# Altium PCB STC12C5A_LQFP44_Mini.PcbDoc
Units mil, origin at the board's own origin, x right, y up, seen from the top; angles counter-clockwise.
Board outline 1305 x 2350 mil, 2 copper layers (Top Layer, Bottom Layer); 39 components, 53 nets, 230 pads, 18 vias.
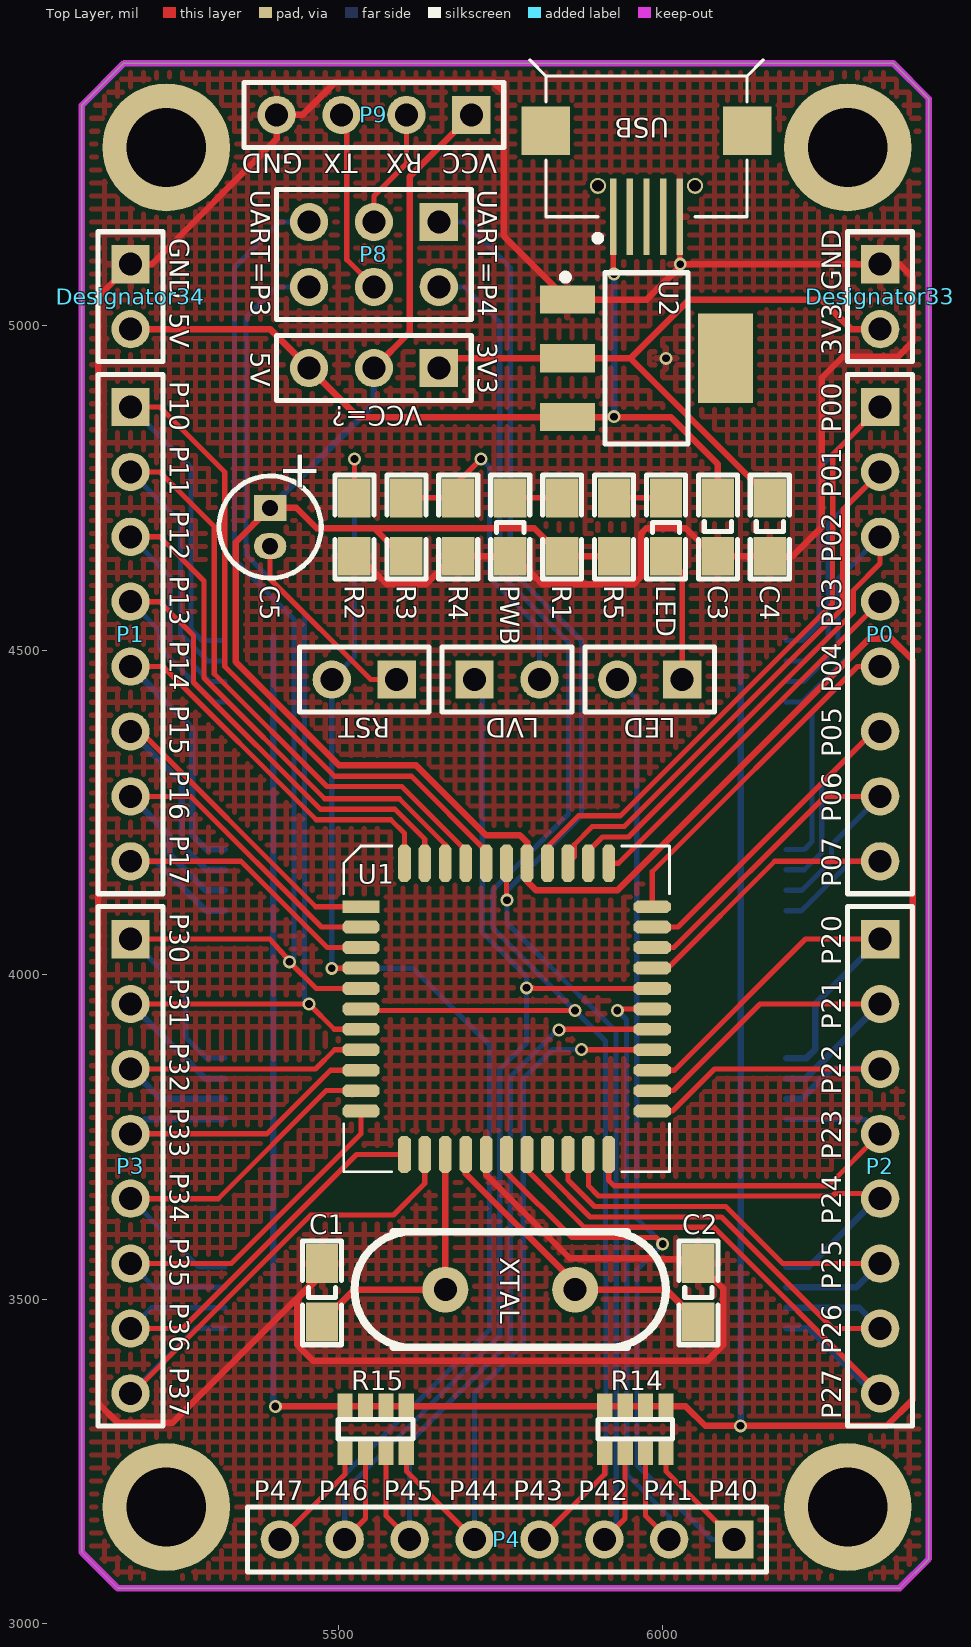
[diagram p0: Top Layer view]
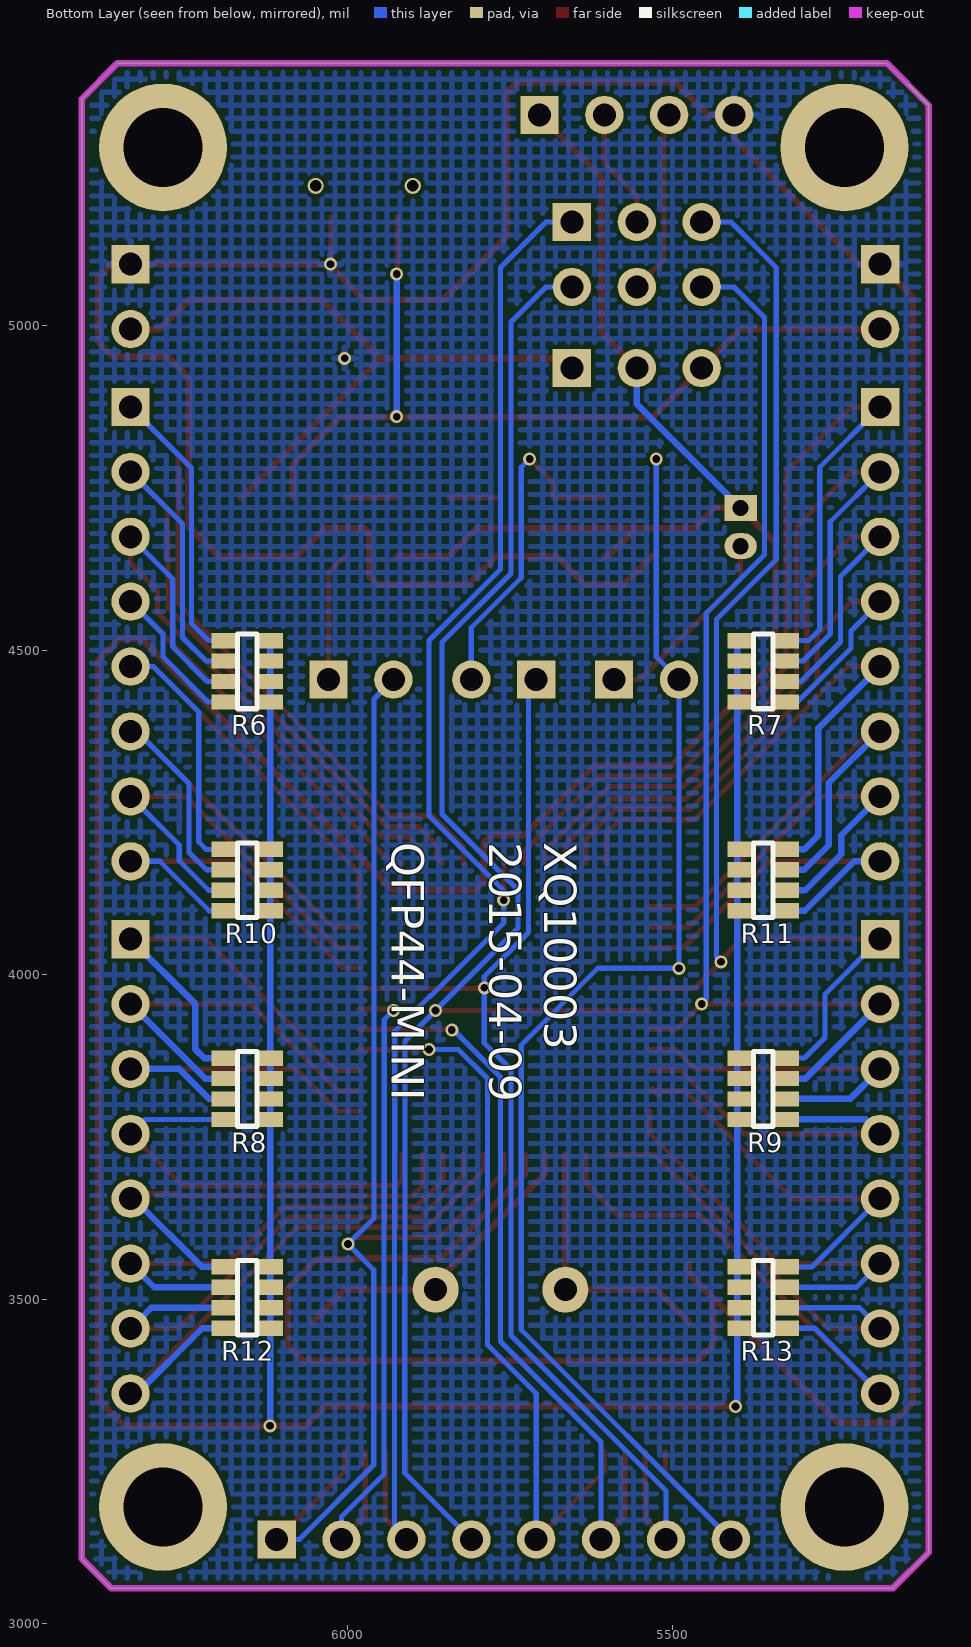
[diagram p1: Bottom Layer view, seen from below]

## Layer stack, top to bottom
Top Layer: signal copper 1.4
Dielectric: dielectric 12.6, FR-4, Dk 4.8
Bottom Layer: signal copper 1.4

## Board outline
5105,3110 5160,3055 6365,3055 6410,3100 6410,5350 6355,5405 5170,5405 5105,5340

## Design rules (kind name [scope] priority, off if disabled: settings)
Clearance [All] p1: gap=6
FabricationTestPointUsage TestPointUsage [All] p1: valid=0 allowmultiple=FALSE
FabricationTestpoint Testpoint [All] p1: side=3 testpointundercomponent=TRUE minsize=40 maxsize=100 preferedsize=60 minholesize=0 maxholesize=40 preferedholesize=32 testpointgrid=1 allowsidetop=TRUE allowsidebottom=TRUE usegrid=TRUE gridtolerance=0.01
HoleSize [All] p1: absolutevalues=TRUE maxlimit=200 minlimit=1 maxpercent=80.000 minpercent=20.000
MinimumSolderMaskSliver [All] p1: minsoldermaskwidth=6
NetAntennae [All] p1: netantennaetolerance=6
PolygonConnect [All] p1: connectstyle=Relief reliefconductorwidth=10 reliefentries=4 polygonreliefangle="90 Angle"
RoutingVias [All] p1: holewidth=12 width=20 viastyle="Through Hole" minholewidth=12 minwidth=20 maxholewidth=28 maxwidth=60
SMDNeckDown [All] p1: percent=100.000
SilkToSilkClearance [All] p1: silktosilkclearance=6
SilkscreenOverComponentPads [All] p1: minsilkscreentomaskgap=0
SolderMaskExpansion [All] p1: expansion=4
Width [All] p1: maxlimit=100 minlimit=6 preferedwidth=8
21 further rules are at their usual default settings.

## Classes and differential pairs
component class STC12C5A_LQFP44_Mini: C1 C2 C3 C4 C5 J1 LED LVD P0 P1 P2 P3 P4 P8 P9 PWB R1 R2 R3 R4 R5 R6 R7 R8 R9 R10 R11 R12 R13 R14 R15 RST U1 U2 VCC=5V Y1

## Components (designator, comment, footprint, x,y, rotation, side; value= is the part's Value field where it differs from the comment)
5V "Header 3" HDR1X3 5655,4935 r180 top (schematic designator P10)
C1 "Cap" C0805 5475,3465 r90 top
C2 "Cap" C0805 6055,3465 r90 top
C3 "Cap" C0805 6085,4645 r90 top
C4 "Cap" C0805 6165,4645 r90 top
C5 "Cap2" CAP-4.2 5395,4690 r270 top
Designator33 "Comment" HDR1X2 6335,5095 r270 top
Designator34 "Comment" HDR1X2 5180,5095 r270 top
LED "Header 2" HDR1X2 6030,4455 r180 top (schematic designator P7)
LED "LED" C0805 6005,4735 r270 top (schematic designator D2)
LVD "Header 2" HDR1X2 5710,4455 r0 top (schematic designator P6)
P0 "Header 8" HDR1X8 6335,4875 r270 top
P1 "Header 8" HDR1X8 5180,4875 r270 top
P2 "Header 8" HDR1X8 6335,4055 r270 top
P3 "Header 8" HDR1X8 5180,4055 r270 top
P4 "Header 8" HDR1X8 6110,3130 r180 top
P8 "Header 3X2A" HDR2X3_CEN 5655,5160 r180 top
P9 "Header 4" HDR1X4 5705,5325 r180 top
PWB "PWB" C0805 5765,4735 r270 top (schematic designator D1)
R1 "Res" 0805 5845,4735 r270 top
R2 "Res" 0805 5525,4645 r90 top
R3 "Res" 0805 5605,4735 r270 top
R4 "Res" 0805 5685,4645 r90 top
R5 "Res" 0805 5925,4735 r270 top
R6 "RES_8P" RES_8P_0603#1 6120,4515 r0 bottom
R7 "RES_8P" RES_8P_0603#2 5395,4515 r180 bottom
R8 "RES_8P" RES_8P_0603#1 6120,3871.67 r0 bottom
R9 "RES_8P" RES_8P_0603#2 5395,3871.67 r180 bottom
R10 "RES_8P" RES_8P_0603#1 6120,4193.33 r0 bottom
R11 "RES_8P" RES_8P_0603#2 5395,4193.33 r180 bottom
R12 "RES_8P" RES_8P_0603#1 6120,3550 r0 bottom
R13 "RES_8P" RES_8P_0603#2 5395,3550 r180 bottom
R14 "RES_8P" RES_8P_0603#2 6005,3335 r270 top
R15 "RES_8P" RES_8P_0603#2 5605,3335 r270 top
RST "Header 2" HDR1X2 5590,4455 r180 top (schematic designator P5)
U1 "STC12C5A60S2_LQFP44" LQFP44 5535,4105 r0 top
U2 "AMS1117" SOT-223 5975,4950 r270 top
USB "USB-MINI" USB-MINI-A-SM 5975,5385 r90 top (schematic designator J1)
XTAL "XTAL" XTAL1 5665,3515 r0 top (schematic designator Y1)

## Footprints (in the part's own frame and the unit in brackets; to place one, negate y for a bottom-side part, rotate by r counter-clockwise, add the part's x,y. Pads: shape width x height; smd on the part's side, far side on the other; paste and mask are expansions set on the pad)
0805 [mil]
  rect 60x50 smd: 1(0,0) 2(90,0)
  silkscreen extent -35,-30 125,30
C0805 [mil]
  rect 60x50 smd: 1(0,0) 2(90,0)
  silkscreen extent -35,-30 125,30
CAP-4.2 [mil] "Capacitor, Electrolytic, Radial; Body 4 x 5 mm (Dia.xH typ); Pin Spacing 1.5 mm (typ)"
  rect 40x50 hole 25: 1(-29.53,0)
  oval 40x50 hole 25: 2(29.53,0)
  silkscreen extent -79,-79 79,79
HDR1X2 [mm] "Connector; Header; 2 Position"
  rect 1.5x1.5 hole 0.9: 1(0,0)
  round 1.5 hole 0.9: 2(2.54,0)
  silkscreen extent -1.27,-1.27 3.81,1.27
HDR1X3 [mm] "Connector; Header; 3 Position"
  rect 1.5x1.5 hole 0.9: 1(0,0)
  round 1.5 hole 0.9: 2(2.54,0) 3(5.08,0)
  silkscreen extent -1.27,-1.27 6.35,1.27
HDR1X4 [mm] "Connector; Header; 4 Position"
  rect 1.5x1.5 hole 0.9: 1(0,0)
  round 1.5 hole 0.9: 2(2.54,0) 3(5.08,0) 4(7.62,0)
  silkscreen extent -1.27,-1.27 8.89,1.27
HDR1X8 [mm] "Connector; Header; 8 Position"
  rect 1.5x1.5 hole 0.9: 1(0,0)
  round 1.5 hole 0.9: 2(2.54,0) 3(5.08,0) 4(7.62,0) 5(10.16,0) 6(12.7,0) 7(15.24,0) 8(17.78,0)
  silkscreen extent -1.27,-1.27 19.05,1.27
HDR2X3_CEN [mm] "Connector; Header; 3x2 Position"
  rect 1.5x1.5 hole 0.9: 1(0,0)
  round 1.5 hole 0.9: 2(2.54,0) 3(5.08,0) 4(0,2.54) 5(2.54,2.54) 6(5.08,2.54)
  silkscreen extent -1.27,-1.27 6.35,3.81
LQFP44 [mm]
  rect 1.45x0.5 smd: 1(0,0)
  oct 1.45x0.5 smd: 2(0,-0.8) 3(0,-1.6) 4(0,-2.4) 5(0,-3.2) 6(0,-4) 7(0,-4.8) 8(0,-5.6) 9(0,-6.4) 10(0,-7.2) 11(0,-8) 23(11.4,-8) 24(11.4,-7.2) 25(11.4,-6.4) 26(11.4,-5.6) 27(11.4,-4.8) 28(11.4,-4) 29(11.4,-3.2) 30(11.4,-2.4) 31(11.4,-1.6) 32(11.4,-0.8) 33(11.4,0)
  oct 0.5x1.45 smd: 12(1.7,-9.7) 13(2.5,-9.7) 14(3.3,-9.7) 15(4.1,-9.7) 16(4.9,-9.7) 17(5.7,-9.7) 18(6.5,-9.7) 19(7.3,-9.7) 20(8.1,-9.7) 21(8.9,-9.7) 22(9.7,-9.7) 34(9.7,1.7) 35(8.9,1.7) 36(8.1,1.7) 37(7.3,1.7) 38(6.5,1.7) 39(5.7,1.7) 40(4.9,1.7) 41(4.1,1.7) 42(3.3,1.7) 43(2.5,1.7) 44(1.7,1.7)
  silkscreen extent -0.67,-10.38 12.08,2.37
RES_8P_0603#1 [mm]
  rect 1.016x0.6 smd: 1(0,0) 2(1.778,0) 3(0,0.8) 4(1.778,0.8) 5(0,1.6) 6(1.778,1.6) 7(0,2.4) 8(1.778,2.4)
  silkscreen extent 0.51,-0.25 1.27,2.67
RES_8P_0603#2 [mm]
  rect 1.016x0.6 smd: 1(0,0) 2(1.778,0) 3(0,-0.8) 4(1.778,-0.8) 5(0,-1.6) 6(1.778,-1.6) 7(0,-2.4) 8(1.778,-2.4)
  silkscreen extent 0.51,-2.67 1.27,0.25
SOT-223 [mm] "SO"
  rect 1.1x2.15 smd: 1(-2.3,-3.1) 2(0,-3.1) 3(2.3,-3.1)
  rect 3.5x2.15 smd: 4(0,3.1)
  silkscreen extent -3.35,-3.3 3.35,1.63
USB-MINI-A-SM [mm]
  rect 3x0.25 smd: 1(-5.508,1.3) 2(-5.508,0.65) 3(-5.508,0) 4(-5.508,-0.65)
  rect 3x0.254 smd: 5(-5.508,-1.3)
  round 0.635 hole 0.457 unplated: MH1(-4.3,1.9) MH2(-4.3,-1.9)
  rect 1.9x1.9 smd: ""(-2.15,3.95) ""(-2.15,-3.95)
  silkscreen extent -6.47,-4.57 0.63,4.57
XTAL1 [mm]
  round 1.8 hole 0.9: 1(0,0) 2(5.08,0)
  silkscreen extent -3.56,-2.26 8.64,2.26

## Part data
5V: "Header, 3-Pin"
C1 C2 C3 C4 C5: "Capacitor"
LED LVD RST: "Header, 2-Pin"
LED PWB: library part LED-2P, "发?"
P0 P1 P2 P3 P4: "Header, 8-Pin"
P8: "Header, 3-Pin, Dual row"
P9: "Header, 4-Pin"
R1 R2 R3 R4 R5: "Resistor"
R6 R7 R8 R9 R10 R11 R12 R13 R14 R15: "贴?"
U1: "增?"
U2: "低压稳压器-1A"
XTAL: "Crystal Oscillator"

## Free pads (board coordinates)
  round 196.85 hole 122.05: 0(5235,3180) 1(6285,3180) 2(6285,5275) 3(5235,5275)

## Via types
v1: diameter 20, hole 12, Top Layer to Bottom Layer, 18 vias

## Nets (pads, with @x,y where several pads share a name; then routed paths per layer and width w, separated by ;. In a path a pad name is that pad's centre, name@x,y a point inside that pad or via, vN(x,y) a via of type N, cw(c..) or ccw(c..) an arc to the next point about the centre after c; other vN are vias at no path point)
3V3: 5V.1 C4.2 Designator33.2 U2.2 | length 1042.1
  Top Layer w10: 5V.1 5670,4950 U2.2 5950,4950 C4.2 ; 5952.91,4952.91 6040,5040 6245,5040 6290,4995 Designator33.2
5V: 5V.3 C3.2 Designator34.2 U2.3 USB.1 | length 1351.6
  Top Layer w8: v1@5923.82,5081.18 USB.1
  Top Layer w10: Designator34.2 5395,4995 5V.3 5530.55,4859.45 U2.3 6012.27,4859.45 6085,4786.72 C3.2 ; v1@5923.82,5081.18 v1(5925,5080)
  Bottom Layer w10: v1(5925,4860) v1(5925,5080)
GND: C1.2 C2.2 C3.1 C4.1 Designator33.1 Designator34.1 P9.4 PWB.2 R2.1 R4.1 U1.16 U2.1 USB.5 | length 6698.4
  Top Layer w8: v1@6025,5095 6026.18,5096.18 USB.5
  Top Layer w10: C1.2@5475,3540 5245,3310 5160,3310 5130,3340 5130,5045 Designator34.1 5212.58,5095 5405,5287.42 P9.4 5444.86,5325 5494.86,5375 5740,5375 5755,5360 5755,5138.5 U2.1 5975.55,5040.55 6025,5090 v1(6027,5095) ; C1.2 5475,3538.38 5437,3500.38 5437,3429.62 5461.62,3405 6068.38,3405 6093,3429.62 6093,3517 6048,3562 5990.47,3562 5989.04,3563.43 5856.57,3563.43 5727.91,3692.09 U1.16 ; R2.1 5531.62,4645 5574.62,4602 5635.38,4602 5678.38,4645 5771.62,4645 5814.62,4602 5955.38,4602 5967,4613.62 5967,4680.38 5974.62,4688 6035.38,4688 6078.38,4645 6200,4645 6245,4690 6245,4920 6277.47,4952.47 6362.47,4952.47 6385,4975 6385,5075 6365,5095 Designator33.1 v1(6027,5095) ; v1@6025,5095 v1(6027,5095)
  other v1: 6005,4950
NetC5_2: C5.2 RST.1 | length 309.7
  Top Layer w8: C5.2 5395,4610 5550,4455 RST.1
NetD1_1: PWB.1 R1.1 | length 80
  Top Layer w8: PWB.1 R1.1
NetD2_1: LED.1@6005,4735 R5.1 | length 80
  Top Layer w8: R5.1 LED.1@6005,4735
NetD2_2: LED.1@6030,4455 LED.2@6005,4645 | length 200.4
  Top Layer w8: LED.2@6005,4645 6030,4620 LED.1@6030,4455
NetP6_2: LVD.2 R3.1 R4.2 | length 528.2
  Top Layer w8: R3.1 R4.2 5685,4760 v1@5717.5,4792.5
  Bottom Layer w8: v1(5720,4795) 5733,4782 5733,4611.75 5810,4534.75 LVD.2
P0.0: P0.1 R6.2 U1.37 | length 1388
  Top Layer w8: U1.37 5822.4,4197.4 5870,4245 5934.75,4245 6261.47,4571.73 6261.47,4682.43 6262,4682.96 6262,4802 P0.1
  Bottom Layer w8: R6.2 6215,4515 6241,4541 6241,4781 P0.1
P0.1: P0.2 R6.4 U1.36 | length 1199.5
  Top Layer w8: U1.36 5863.55,4181.58 5863.55,4200.52 5891.5,4228.47 5940.85,4228.47 6277.47,4565.1 6277.47,4675.8 6278,4676.33 6278,4717.06 6335,4774.06 P0.2
  Bottom Layer w8: R6.4 6218.5,4483.5 6255,4520 6255,4695 P0.2
P0.2: P0.3 R6.6 U1.35 | length 1011.9
  Top Layer w8: U1.35 5885.39,4190.87 5907,4212.47 5947.47,4212.47 6293.47,4558.47 6293.47,4592.2 6335,4633.73 P0.3
  Bottom Layer w8: R6.6 6217.01,4452.01 6270,4505 6270,4610 P0.3
P0.3: P0.4 R6.8 U1.34 | length 815.3
  Top Layer w8: U1.34 5931.93,4171.93 P0.4
  Bottom Layer w8: R6.8@6190.51,4420 R6.8 6215.51,4420.51 6285,4490 6285,4525 P0.4
P0.4: P0.5 R10.2 U1.33 | length 914.8
  Top Layer w8: U1.33 5983.82,4158.82 6300,4475 P0.5
  Bottom Layer w8: R10.2 6218.33,4193.33 6230,4205 6230,4405 6300,4475 P0.5
P0.5: P0.6 R10.4 U1.32 | length 771.6
  Top Layer w8: U1.32 6023.5,4073.5 6325,4375 P0.6
  Bottom Layer w8: R10.4 6218.16,4161.84 6245,4188.67 6245,4295 6325,4375 P0.6
P0.6: P0.7 R10.6 U1.31 | length 683.8
  Top Layer w8: U1.31 6017.01,4042.01 6250,4275 P0.7
  Bottom Layer w8: R10.6 6214.66,4130.34 6260,4175.68 6260,4200 P0.7 P0.7@6322.99,4287.01
P0.7: P0.8 R10.8 U1.30 | length 595.9
  Top Layer w8: U1.30 6008.14,4010.51 6172.63,4175 P0.8
  Bottom Layer w8: R10.8 6213.85,4098.85 6290,4175 P0.8
P1.0: P1.1 R7.2 U1.40 | length 1466.5
  Top Layer w8: P1.1 5225,4875 5325,4775 5325,4475 5494,4306 5612.78,4306 5727.91,4190.87 U1.40
  Bottom Layer w8: P1.1 5273,4782 5273,4532 5290,4515 R7.2
P1.1: P1.2 R7.4 U1.41 | length 1277.6
  Top Layer w8: P1.2 5225,4775 5309,4691 5309,4463.88 5482.88,4290 5597.88,4290 5696.42,4191.46 U1.41
  Bottom Layer w8: P1.2 5257,4698 5257,4525.37 5298.87,4483.5 R7.4
P1.2: P1.3 R7.6 U1.42 | length 1094.2
  Top Layer w8: P1.3 5225,4675 5293,4607 5293,4457.25 5479.07,4271.19 5594.07,4271.19 5664.92,4200.33 U1.42
  Bottom Layer w8: P1.3 5241,4614 5241,4513.02 5302.01,4452.01 R7.6
P1.3: P1.4 R7.8 U1.43 | length 909.3
  Top Layer w8: P1.4 5225,4575 5277,4523 5277,4450.63 5472.63,4255 5587.63,4255 5633.43,4209.2 U1.43
  Bottom Layer w8: P1.4 5225,4530 5225,4503.23 5307.71,4420.51 R7.8
P1.4: P1.5 R11.2 U1.44 | length 942.8
  Top Layer w8: P1.5 5230,4475 5466,4239 5581,4239 5601.93,4218.07 U1.44
  Bottom Layer w8: P1.5@5180,4465 P1.5
  Bottom Layer w10: P1.5 5275,4380 5275,4215 5296.67,4193.33 R11.2
P1.5: P1.6 R11.4 U1.1 | length 756.6
  Top Layer w8: P1.6 5195.25,4375 5465.25,4105 U1.1
  Bottom Layer w10: P1.6 5259,4296 5259,4199.67 5296.84,4161.84 R11.4
P1.6: P1.7 R11.6 U1.2 | length 677.5
  Top Layer w8: P1.7 5272.63,4275 5474.12,4073.5 U1.2
  Bottom Layer w8: P1.7 P1.7@5192.01,4287.01
  Bottom Layer w10: P1.7 5240,4215 5240,4185.68 5295.34,4130.34 R11.6
P1.7: P1.8 R11.8 U1.3 | length 586.6
  Top Layer w8: P1.8 5350,4175 5482.99,4042.01 U1.3
  Bottom Layer w10: P1.8 5220,4175 5296.15,4098.85 R11.8
P2.0: P2.1 R8.2 U1.25 | length 696.8
  Top Layer w8: U1.25 6018.03,3853.03 6220,4055 P2.1
  Bottom Layer w10: R8.2 6221.67,3871.67 6235,3885 6235,3955 P2.1
P2.1: P2.2 R8.4 U1.24 | length 599
  Top Layer w8: U1.24 6016.54,3821.54 6150,3955 P2.2
  Bottom Layer w10: R8.4 6219.83,3840.17 6334.66,3955 P2.2
P2.2: P2.3 R8.6 U1.23 | length 542.3
  Top Layer w8: U1.23 6015.04,3790.04 6080,3855 P2.3
  Bottom Layer w10: R8.6 6213.67,3808.67 6260,3855 P2.3
P2.3: P2.4 R8.8 U1.22 | length 648.8
  Top Layer w8: U1.22 5916.89,3683.11 5925,3675 6255,3675 P2.4
  Bottom Layer w8: R8.8 6312.82,3777.18 P2.4
P2.4: P2.5 R12.2 U1.21 | length 697.9
  Top Layer w8: U1.21 5885.39,3674.86 5901.25,3659 6261.63,3659 6265.63,3663 6327,3663 P2.5
  Bottom Layer w10: R12.2 6225,3550 6330,3655 P2.5
P2.5: P2.6 R12.4 U1.20 | length 733.9
  Top Layer w8: U1.20 5853.9,3683.73 5894.63,3643 6097,3643 6185,3555 P2.6
  Bottom Layer w10: R12.4 6298.5,3518.5 P2.6
P2.6: P2.7 R12.6 U1.19 | length 799.8
  Top Layer w8: U1.19 5822.4,3692.6 5888,3627 6090.37,3627 6262.37,3455 P2.7
  Bottom Layer w10: R12.6 6302.99,3487.01 P2.7
P2.7: P2.8 R12.8 U1.18 | length 898
  Top Layer w8: U1.18 5790,3722.2 5790,3700 5879,3611 6079,3611 P2.8
  Bottom Layer w10: R12.8 6224.49,3455.51 6325,3355 P2.8
P3.0: P3.1 P8.3 R9.2 U1.5 | length 1903.1
  Top Layer w8: P3.1 5395,4055 v1@5425.62,4020.55 ; v1(5425,4020) 5465.98,3979.02 U1.5
  Bottom Layer w8: P3.1 5265,3970 5265,3903.33 5296.67,3871.67 R9.2 ; v1(5425,4020) 5432,4027 5432,4548 5340,4640 5340,5090 5410,5160 P8.3
P3.1: P3.2 P8.6 R9.4 U1.7 | length 1778.4
  Top Layer w8: P3.2 v1(5455,3955) 5493.98,3916.02 U1.7
  Bottom Layer w8: v1(5455,3955) 5448,3962 5448,4557.22 5358,4647.22 5358,4673.73 5358,5013 5405,5060 P8.6
  Bottom Layer w10: P3.2 5180.34,3955 5295.17,3840.17 R9.4
P3.2: P3.3 R9.6 U1.8 | length 531.4
  Top Layer w8: P3.3 5465,3855 5494.53,3884.53 U1.8
  Bottom Layer w10: P3.3 5226.33,3808.67 R9.6
P3.3: P3.4 R9.8 U1.9 | length 549.8
  Top Layer w8: P3.4 5390,3755 5488.03,3853.03 U1.9
  Bottom Layer w10: P3.4 5202.18,3777.18 R9.8
P3.4: P3.5 R13.2 U1.10 | length 626.6
  Top Layer w8: P3.5 5315,3655 5481.54,3821.54 U1.10 ; U1.10@5521.54,3815 U1.10@5531.54,3825
  Bottom Layer w8: P3.5 5285,3550 R13.2
P3.5: P3.6 R13.4 U1.11 | length 633
  Top Layer w8: P3.6 5335,3555 5535,3755 U1.11
  Bottom Layer w8: P3.6 5216.5,3518.5 R13.4
P3.6: P3.7 R13.6 U1.12 | length 691.2
  Top Layer w8: P3.7 5260,3455 5528.11,3723.11 U1.12
  Bottom Layer w8: P3.7 5212.01,3487.01 R13.6
P3.7: P3.8 R13.8 U1.13 | length 818.7
  Top Layer w8: P3.8 5182.63,3355 5457.63,3630 5585,3630 5633.43,3678.43 U1.13
  Bottom Layer w8: P3.8 5280.51,3455.51 R13.8
P4.0: LED.2@5930,4455 P4.1 R14.2 U1.17 | length 1945.2
  Top Layer w8: U1.17 5759.41,3695.59 5860,3595 5990,3595 v1(6000,3585) ; R14.2 6005,3235 P4.1
  Bottom Layer w8: LED.2@5930,4455 5960,4425 5960,3625 v1(6000,3585) 5960.43,3545.43 5960.43,3244.57 6075,3130 P4.1
P4.1: P4.2 R14.4 U1.28 | length 1053.1
  Top Layer w8: v1(5930,3945) 5932.52,3947.52 U1.28 ; R14.4 5973.5,3166.5 P4.2
  Bottom Layer w8: v1(5930,3945) 5944,3931 5944,3618.37 5944.43,3617.94 5944.43,3230.57 6010,3165 P4.2
P4.2: P4.3 P8.1 R14.6 U1.39 | length 2475.7
  Top Layer w8: U1.39 5759.41,4115.59 v1(5760,4115) ; P4.3 5942.01,3162.01 R14.6
  Bottom Layer w8: P8.1 5695,5160 5765,5090 5765,4625 5875,4515 5875,4245 5760,4130 v1(5760,4115) 5760,4080 5873,3967 5874.11,3967 5928,3913.11 5928,3611.75 5928.43,3611.31 5928.43,3148.43 P4.3
P4.3: P4.4 P8.4 R14.8 U1.6 | length 2707.1
  Top Layer w8: U1.6 5537.52,3945 v1(5865,3945) ; P4.4 5910.51,3230.51 R14.8
  Bottom Layer w8: P8.4 5695,5060 5749,5006 5749,4618.37 5855,4512.37 5855,4247.63 5738,4130.63 5738,4072 v1(5865,3945) 5912,3898 5912,3535.08 5912.43,3534.65 5912.43,3232.43 P4.4
P4.4: P4.5 R15.2 U1.26 | length 1137.2
  Top Layer w8: R15.2 5605,3235 P4.5 ; v1(5875,3885) 5875.47,3884.53 U1.26
  Bottom Layer w8: P4.5 5710,3355 5785,3430 5785,3840 5830,3885 v1(5875,3885)
P4.5: P4.6 R15.4 U1.27 | length 1176.2
  Top Layer w8: R15.4 5573.5,3166.5 P4.6 ; v1(5840,3915) 5841.02,3916.02 U1.27
  Bottom Layer w8: P4.6 5610,3280 5765,3435 5765,3842.63 5837.37,3915 v1(5840,3915)
P4.6: LVD.1 P4.7 R15.6 U1.29 | length 1806.6
  Top Layer w8: P4.7 5542.01,3162.01 R15.6 ; 5800,3980 5800.98,3979.02 U1.29
  Bottom Layer w8: P4.7 5510,3205 5749,3444 5749,3854 5790,3895 v1(5790,3980) 5790,3997.37 5722,4065.37 5722,4443 LVD.1
P4.7: P4.8 R2.2 R15.8 RST.2 U1.4 | length 2269
  Top Layer w8: P4.8 5510.51,3230.51 R15.8 ; v1(5490,4010) 5534.49,4010 U1.4 ; R2.2 v1(5525,4795)
  Bottom Layer w8: P4.8 5733,3453 5733,3892 5615,4010 v1(5490,4010) RST.2 5525,4490 v1(5525,4795)
RX: P8.2 P9.2 | length 185.7
  Top Layer w8: P8.2 5555,5200 5605,5250 P9.2
TX: P8.5 P9.3 | length 285.7
  Top Layer w8: P9.3 5513,5317 5513,5102 P8.5
VCC: 5V.2 C5.1 P9.1 R1.2 R3.2 R5.2 R6.1 R6.3 R6.5 R6.7 R7.1 R7.3 R7.5 R7.7 R8.1 R8.3 R8.5 R8.7 R9.1 R9.3 R9.5 R9.7 R10.1 R10.3 R10.5 R10.7 R11.1 R11.3 R11.5 R11.7 R12.1 R12.3 R12.5 R12.7 R13.1 R13.3 R13.5 R13.7 R14.1 R14.3 R14.5 R14.7 R15.1 R15.3 R15.5 R15.7 U1.38 | length 7572.9
  Top Layer w10: v1(5403,3335) 6035.47,3335 6065.47,3305 6345.14,3305 6385,3344.86 6385,4485 ; 5V.2 5610,4990 5610,5230 P9.1 ; R3.2 5598.38,4645 5555.38,4688 ; R5.2 R1.2 5802,4688 5555.38,4688 ; 6385.07,4485.07 6352.62,4517.53 6317.38,4517.53 5929.86,4130 5805,4130 5790.91,4144.09 U1.38 5790.91,4204.09 5780,4215 5727.82,4215 5619.82,4323 5501.04,4323 5342,4482.04 5342,4666.53 C5.1 5435.47,4719.53 5467,4688 5555.38,4688
  Bottom Layer w10: C5.1 5555,4879.53 5V.2 ; R7.1@5400,4521 5400,3338 v1(5403,3335) ; v1(6120,3305) R6.1@6120,4520
XTAL1: C2.1 U1.15 XTAL.2 | length 488.6
  Top Layer w10: U1.15 5696.42,3693.58 5865,3525 XTAL.2 6005,3515 C2.1
XTAL2: C1.1 U1.14 XTAL.1 | length 418.8
  Top Layer w10: C1.1 5525,3515 XTAL.1 U1.14@5665,3723.11
pads on no net: U2.4 USB. USB.2 USB.3 USB.4 USB.MH1 USB.MH2

## Polygon pours and split planes (outlines as drawn)
GND on Top Layer "Top Layer-No Net" (hatched 90Degree grid 20 track 8, remove dead copper, pour order 2): 5105,3110 5160,3055 6365,3055 6410,3100 6410,5350 6355,5405 5180,5405 5115,5340 5105,5340 5105,3110
GND on Bottom Layer "Top Overlay-No Net" (hatched 90Degree grid 20 track 8, remove dead copper, pour order 5): 6410,5350 6355,5405 5170,5405 5105,5340 5105,3110 5150,3065 5160,3065 6355,3065 6365,3055 6410,3100 6410,5350

## Keep-outs
Keep-Out Layer:
  the board outline again, w10

## Silkscreen, mask and mechanical layers (free items; w line width, h text height)
Top Overlay:
  text "GND" at 5445,5265 h30 r180
  text "TX" at 5530,5265 h30 r180
  text "RX" at 5630,5265 h30 r180
  text "VCC" at 5745,5265 h30 r180
  text "GND" at 5240,5135 h30 r270
  text "GND" at 6275,5055 h30 r90
  text "5V" at 5240,5020 h30 r270
  text "3V3" at 5715,4975 h30 r270
  text "3V3" at 6275,4955 h30 r90
  text "P10" at 5240,4915 h30 r270
  text "VCC=?" at 5630,4876.45 h30 r180
  text "P00" at 6275,4835 h30 r90
  text "P11" at 5240,4815 h30 r270
  text "P01" at 6275,4735 h30 r90
  text "P12" at 5240,4715 h30 r270
  text "P02" at 6275,4635 h30 r90
  text "P13" at 5240,4615 h30 r270
  text "P03" at 6275,4535 h30 r90
  text "P14" at 5240,4515 h30 r270
  text "P04" at 6275,4435 h30 r90
  text "P15" at 5240,4415 h30 r270
  text "P05" at 6275,4335 h30 r90
  text "P16" at 5240,4315 h30 r270
  text "P06" at 6275,4235 h30 r90
  text "P17" at 5240,4215 h30 r270
  text "P07" at 6275,4135 h30 r90
  text "P30" at 5240,4095 h30 r270
  text "P20" at 6275,4015 h30 r90
  text "P31" at 5240,3995 h30 r270
  text "P21" at 6275,3915 h30 r90
  text "P32" at 5240,3895 h30 r270
  text "P22" at 6275,3815 h30 r90
  text "P33" at 5240,3795 h30 r270
  text "P23" at 6275,3715 h30 r90
  text "P34" at 5240,3695 h30 r270
  text "P24" at 6275,3615 h30 r90
  text "P35" at 5240,3595 h30 r270
  text "P25" at 6275,3515 h30 r90
  text "P36" at 5240,3495 h30 r270
  text "P26" at 6275,3415 h30 r90
  text "P37" at 5240,3395 h30 r270
  text "P27" at 6275,3315 h30 r90
  text "P47" at 5370,3190 h30
  text "P46" at 5470,3190 h30
  text "P45" at 5570,3190 h30
  text "P44" at 5670,3190 h30
  text "P43" at 5770,3190 h30
  text "P42" at 5870,3190 h30
  text "P41" at 5970,3190 h30
  text "P40" at 6070,3190 h30
Bottom Overlay:
  text "XQ10003" at 5697.57,4204.09 h50 r90
  text "2015-04-09" at 5782.57,4204.09 h50 r90
  text "QFP44-MINI" at 5932.57,4204.09 h50 r90
Mechanical 16:
  drawing of 1874 lines, arcs and shapes, not listed
  text "1" at 1427,7465 h70
  text "2" at 4287,7465 h70
  text "3" at 7167,7465 h70
  text "4" at 10037,7465 h70
  text "A" at 75,6559 h70
  text "A" at 11375,6559 h70
  text "B" at 75,4667 h70
  text "B" at 11375,4667 h70
  text "C" at 75,2757 h70
  text "C" at 11375,2757 h70
  text "ENGINEER:" at 6850,1300 h45
  text "TITLE:" at 8350,1300 h45
  text "PCB DESIGNER:" at 6850,1005 h45
  text "D" at 75,867 h70
  text "D" at 11375,867 h70
  text "DATE:" at 6850,700 h45
  text "PART NO.:" at 8350,700 h45
  text "REV:" at 10450,700 h45
  text "Altium Limited" at 5550,600 h70
  text ".PRINT_DATE" at 6900,580 h70
  text "12a Rodborough Rd" at 5550,500 h70
  text "Frenchs Forest" at 5550,400 h70
  text "FILE NAME:" at 6850,400 h45
  text "DWG NO:" at 8350,400 h45
  text "SCALE:" at 10450,400 h45
  text "NSW 2086" at 5550,300 h70
  text ".PCB_FILE_NAME_NO_PATH" at 6900,280 h70
  text "1" at 1427,65 h70
  text "2" at 4287,65 h70
  text "3" at 7167,65 h70
  text "4" at 10037,65 h70

## Text inside footprints (layer, text, board x,y; h text height)
C5: Top Overlay "+" at 5415,4810 h59.06 r270
P8: Top Overlay "UART=P4" at 5715,5210 h30 r270; Top Overlay "UART=P3" at 5365,5210 h30 r270